# Altium PCB BUF802_Eval.PcbDoc
Units mm, origin at the board's own origin, x right, y up, seen from the top; angles counter-clockwise.
Board outline 23.25 x 13.5 mm, 4 copper layers (L1, L2, L3, L4), stack 1.641 mm thick; 41 components, 19 nets, 104 pads, 40 vias.
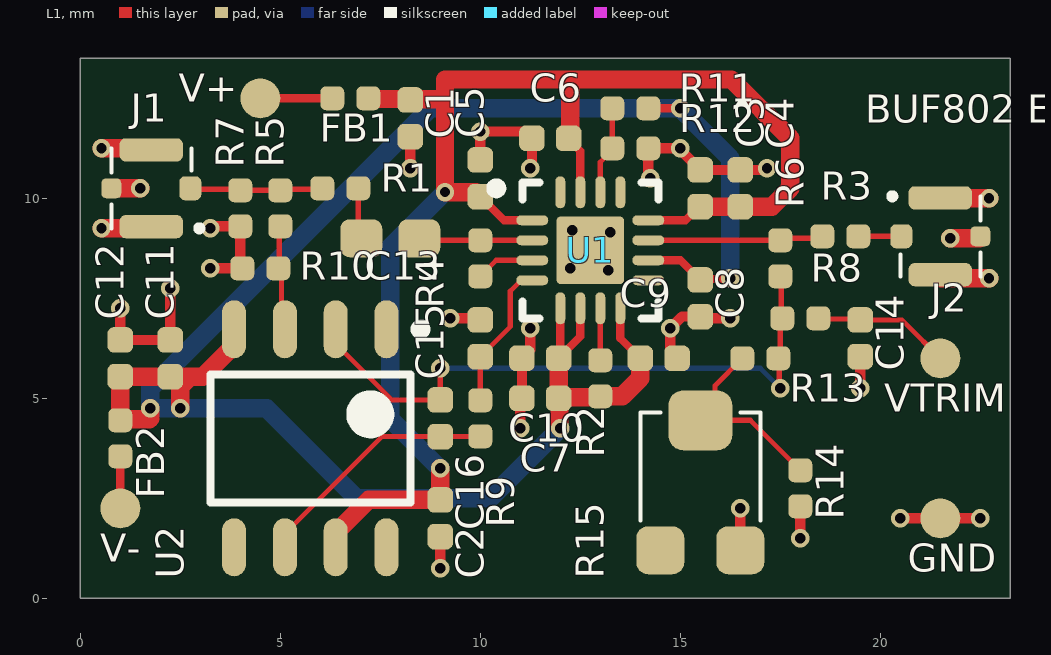
[diagram p0: L1 view]
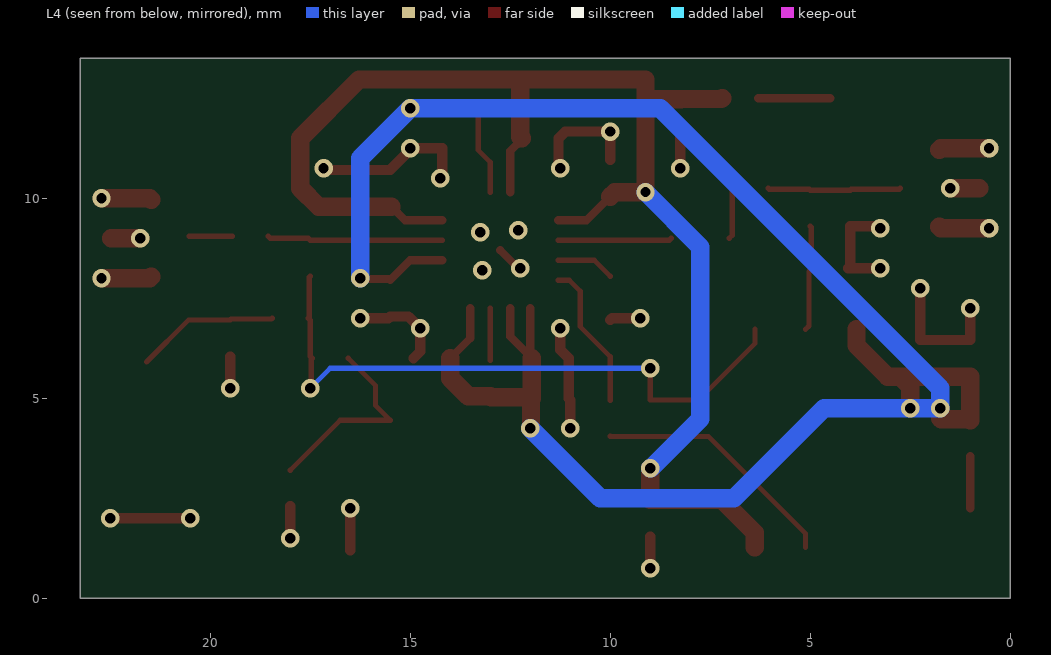
[diagram p1: L4 view, seen from below]
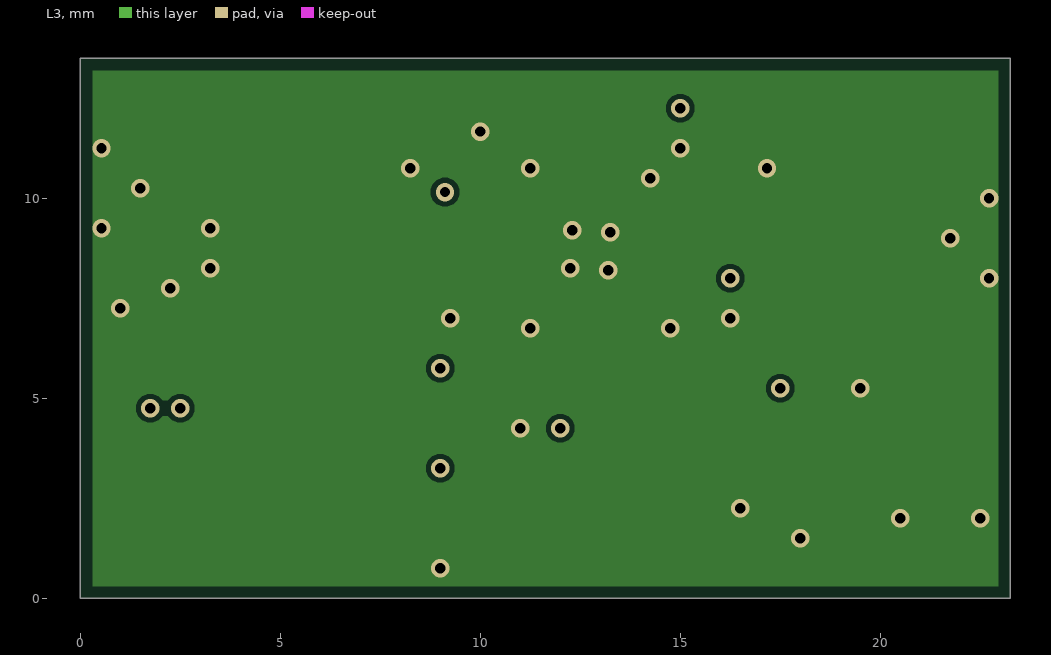
[diagram p2: L3]
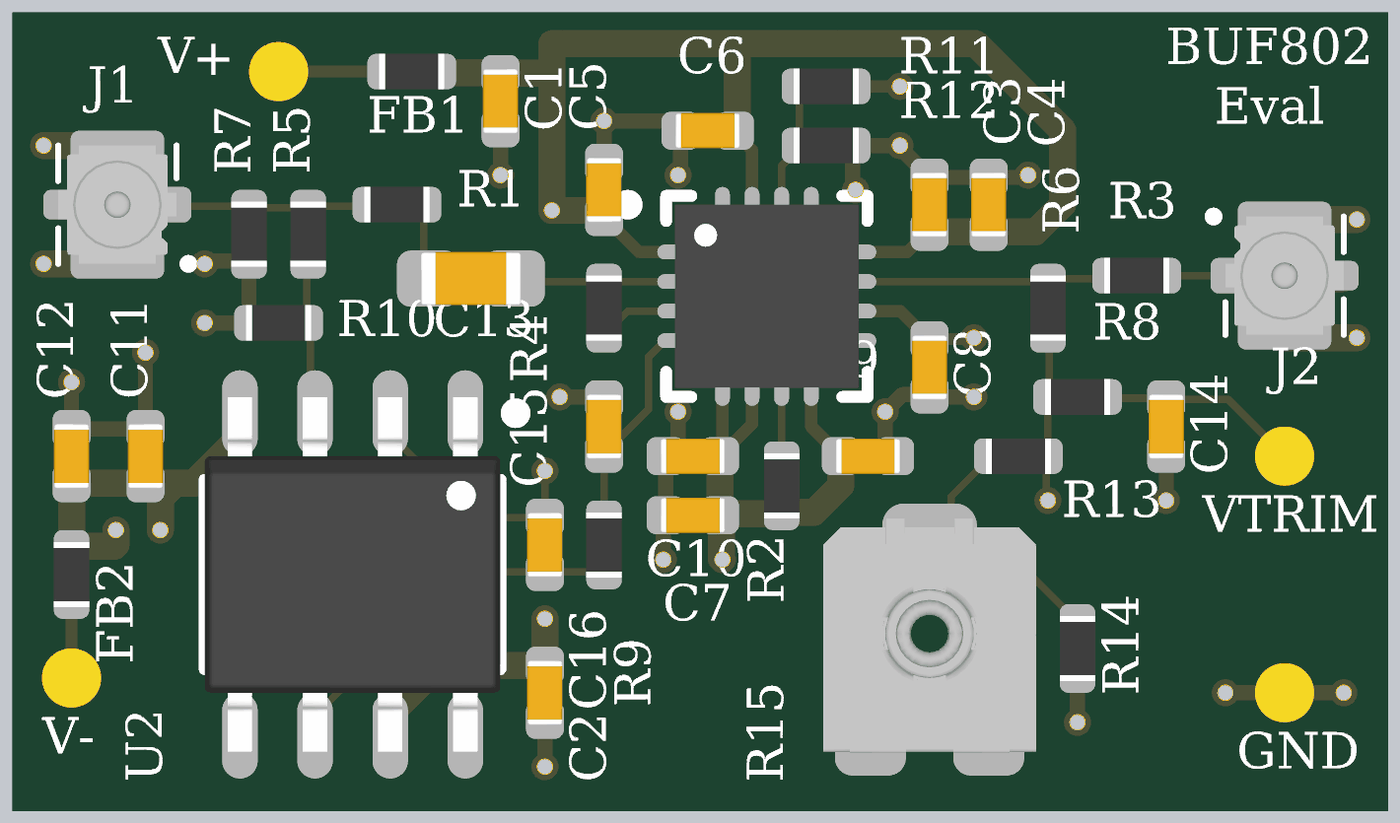
[diagram p3: 3D render of the assembled board from above, using the file's embedded part models]

## Layer stack, top to bottom
Top Solder: solder mask 0.0025, Solder Resist, Dk 1
L1: signal copper 0.0356
Prepeg1: dielectric 0.1702, FR408, Dk 3.66
L2: signal copper 0.0178
Core: dielectric 1.1938, FR-4, Dk 3.66
L3: signal copper 0.0178
Prepeg2: dielectric 0.1702, FR408, Dk 3.66
L4: signal copper 0.0356
Bottom Solder: solder mask 0.0025, Solder Resist, Dk 1

## Board outline
0,0 23.25,0 23.25,13.5 0,13.5

## Design rules (kind name [scope] priority, off if disabled: settings)
BoardOutlineClearance [All] p1: gap=0.3 ignorepadtopadclearanceinfootprint=FALSE
Clearance "Clearance Polygons" [InPolygon] p1: gap=0.127 ignorepadtopadclearanceinfootprint=FALSE
Clearance [All] p2: gap=0.127 ignorepadtopadclearanceinfootprint=FALSE except(0: Arc-Hole Track-Hole SMDPad-Hole THPad-Hole Via-Hole Fill-Hole Poly-Hole Region-Hole Text-Hole)
ComponentClearance "HM-TRP & UFL" [InComponent('X1') vs InComponent('U1')] p1: gap=0 collisioncheckmode=3 verticalgap=0 showdistances=FALSE
ComponentClearance [All] p2: gap=0.025 collisioncheckmode=3 verticalgap=0.025 showdistances=FALSE
DiffPairsRouting [All] p1: maxlimit=10 minlimit=0.127 mostfreqgap=0.203 toplayer_minwidth=0.127 toplayer_maxwidth=0.381 toplayer_prefwidth=0.203 midlayer1_minwidth=0.127 midlayer1_maxwidth=0.381 midlayer1_prefwidth=0.203 midlayer2_minwidth=0.127 midlayer2_maxwidth=0.381 midlayer2_prefwidth=0.203 bottomlayer_minwidth=0.127 bottomlayer_maxwidth=0.381 bottomlayer_prefwidth=0.203 substack1={B7EAD043-F373-4906-B1FF-5FCB2E832E9A} toplayer_{b7ead043-f373-4906-b1ff-5fcb2e832e9a}_minwidth=0.381 toplayer_{b7ead043-f373-4906-b1ff-5fcb2e832e9a}_maxwidth=0.381 toplayer_{b7ead043-f373-4906-b1ff-5fcb2e832e9a}_prefwidth=0.381 midlayer1_{b7ead043-f373-4906-b1ff-5fcb2e832e9a}_minwidth=0.381 midlayer1_{b7ead043-f373-4906-b1ff-5fcb2e832e9a}_maxwidth=0.381 midlayer1_{b7ead043-f373-4906-b1ff-5fcb2e832e9a}_prefwidth=0.381 midlayer2_{b7ead043-f373-4906-b1ff-5fcb2e832e9a}_minwidth=0.381 midlayer2_{b7ead043-f373-4906-b1ff-5fcb2e832e9a}_maxwidth=0.381 midlayer2_{b7ead043-f373-4906-b1ff-5fcb2e832e9a}_prefwidth=0.381 bottomlayer_{b7ead043-f373-4906-b1ff-5fcb2e832e9a}_minwidth=0.381 bottomlayer_{b7ead043-f373-4906-b1ff-5fcb2e832e9a}_maxwidth=0.381 bottomlayer_{b7ead043-f373-4906-b1ff-5fcb2e832e9a}_prefwidth=0.381 maxuncoupledlength=12.7
HoleSize [All] p1: absolutevalues=TRUE maxlimit=6.731 minlimit=0.254 maxpercent=80.000 minpercent=20.000
HoleToHoleClearance [All] p1: gap=0.254 allowstackedmicrovias=FALSE
MinimumAnnularRing [All] p1: minimumring=0.102
MinimumSolderMaskSliver [All] p1: minsoldermaskwidth=0
PlaneClearance [All] p1: clearance=0.254
PlaneConnect [All] p1: planeconnectstyle=Direct reliefexpansion=0.102 reliefentries=4 reliefconductorwidth=0.152 reliefairgap=0.152
PolygonConnect "Via connect style" [isVia] p1: connectstyle=Direct reliefconductorwidth=0.254 reliefentries=4 polygonreliefangle="90 Angle" airgapwidth=0.254
PolygonConnect [All] p2: connectstyle=Direct reliefconductorwidth=0.254 reliefentries=4 polygonreliefangle="90 Angle" airgapwidth=0.152
RoutingCorners [All] p1: cornerstyle=45-Degree minsetback=1.25 maxsetback=1.25
RoutingVias [All] p1: holewidth=0.254 width=0.457 viastyle="Through Hole" minholewidth=0.254 minwidth=0.457 maxholewidth=0.254 maxwidth=0.457
SilkToSilkClearance [All] p1: silktosilkclearance=0
SilkToSolderMaskClearance [IsPad] p1: minsilkscreentomaskgap=0.127 clearancetoexposedcopper=TRUE
SolderMaskExpansion [All] p1: expansion=0 istentingtop=FALSE
Width [All] p1: maxlimit=10.16 minlimit=0.127 preferedwidth=0.203 substack1={B7EAD043-F373-4906-B1FF-5FCB2E832E9A}
20 further rules are at their usual default settings.

## Components (designator, comment, footprint, x,y, rotation, side; value= is the part's Value field where it differs from the comment)
C1 "2.2uF" GEN_C_0402 8.25,12 r90 top
C2 "100nF" GEN_C_0402 9,2 r270 top
C3 "100nF" GEN_C_0402 15.5,10.25 r90 top
C4 "100nF" GEN_C_0402 16.5,10.25 r90 top
C5 "100nF" GEN_C_0402 10,10.5 r270 top
C6 "100nF" GEN_C_0402 11.75,11.5 r0 top
C7 "100nF" GEN_C_0402 11.5,5 r0 top
C8 "100nF" GEN_C_0402 15.5,7.5 r90 top
C9 "100nF" GEN_C_0402 14.46,6 r0 top
C10 "100nF" GEN_C_0402 11.5,6 r180 top
C11 "100nF" GEN_C_0402 2.25,6 r90 top
C12 "2.2uF" GEN_C_0402 1,6 r270 top
C13 "22nF" GEN_C_0603 7.75,9 r180 top
C14 "100nF" GEN_C_0402 19.5,6.5 r270 top
C15 "TBD" GEN_C_0402 10,6.5 r270 top
C16 "TBD" GEN_C_0402 9,4.5 r90 top
FB1 "120@100MHZ" GEN_R_0402 6.75,12.5 r0 top
FB2 "120@100MHZ" GEN_R_0402 1,4 r270 top
GND "PCB" GEN_TP_PCB 21.5,2 r90 top (schematic designator TP3)
J1 "UFL" TE_2334884-1 1.775,10.25 r90 top
J2 "UFL" TE_2334884-1 21.5,9.05 r270 top
R1 "49.9" GEN_R_0402 6.5,10.25 r0 top
R2 "100k" GEN_R_0402 13,5.5 r270 top
R3 "49.9" GEN_R_0402 19,9.05 r0 top
R4 "909k" GEN_R_0402 10,8.5 r90 top
R5 "909k" GEN_R_0402 5,9.75 r90 top
R6 "90.9k" GEN_R_0402 17.5,8.5 r90 top
R7 "49.9" GEN_R_0402 4,9.75 r90 top
R8 "90.9k" GEN_R_0402 18,7 r180 top
R9 "2K" GEN_R_0402 10,4.5 r270 top
R10 "90.9k" GEN_R_0402 4.5,8.25 r0 top
R11 "0" GEN_R_0402 13.75,12.25 r180 top
R12 "0" GEN_R_0402 13.75,11.25 r180 top
R13 "10K" GEN_R_0402 17,6 r0 top
R14 "DNP" GEN_R_0402 18,2.75 r90 top
R15 "5K TRIMPOT" BOU_3mm_POT 15.5,2.75 r0 top value=5K
U1 "BUF802" TI_VQFN_RGT0016C 12.75,8.7 r0 top
U2 "OP07CDR" TI_SOIC8_D0008A 5.75,4 r270 top
V+ "PCB" GEN_TP_PCB 4.5,12.5 r270 top (schematic designator TP1)
V- "PCB" GEN_TP_PCB 1,2.25 r0 top (schematic designator TP2)
VTRIM "PCB" GEN_TP_PCB 21.5,6 r90 top (schematic designator TP4)

## Footprints (in the part's own frame and the unit in brackets; to place one, negate y for a bottom-side part, rotate by r counter-clockwise, add the part's x,y. Pads: shape width x height; smd on the part's side, far side on the other; paste and mask are expansions set on the pad)
BOU_3mm_POT [mm]
  rrect50% 1.2x1.2 smd: 1(-1,-1.55) 3(1,-1.55)
  rrect50% 1.6x1.5 smd: 2(0,1.7)
  silkscreen extent -1.5,-0.8 1.5,1.9, body extent -1.8,-1.76 1.8,2.2, height 1.13
GEN_C_0402 [mm] "Chip Capacitor, 0402, IPC Medium Density"
  rrect50% 0.64x0.64 smd: 1(-0.46,0) 2(0.46,0)
  body extent -0.55,-0.3 0.55,0.3, height 0.6
GEN_C_0603 [mm] "Chip Capacitor, 2-Leads, Body 1.60x0.80mm, IPC Medium Density"
  rrect50% 1.05x0.95 smd: 1(-0.725,0) 2(0.725,0)
  body extent -0.85,-0.45 0.85,0.45, height 0.9
GEN_R_0402 [mm] "Chip Resistor, 2-Leads, Body 1.00x0.50mm, IPC Medium Density"
  rrect50% 0.6x0.6 smd: 1(-0.45,0) 2(0.45,0)
  body extent -0.55,-0.3 0.55,0.3, height 0.4
GEN_TP_PCB [mm]
  round 1 smd paste-1: 1(0,0)
TE_2334884-1 [mm]
  rrect50% 0.6x0.55 smd: 1(0,-0.975)
  rrect50% 0.58x1.58 smd: 2(-0.96,0) 2(0.96,0)
  rrect50% 0.5x0.5 smd: 2(0,1)
  silkscreen extent -1.05,-1.25 1,1, body extent -1,-1 1,1, height 0.6
TI_SOIC8_D0008A [mm] "SOIC, 8-Leads, Body 4.91x3.90mm, Pitch 1.27mm, Height 1.75mm, IPC Medium Density"
  oval 1.45x0.6 smd: 1(-2.725,1.905) 2(-2.725,0.635) 3(-2.725,-0.635) 4(-2.725,-1.905) 5(2.725,-1.905) 6(2.725,-0.635) 7(2.725,0.635) 8(2.725,1.905)
  silkscreen extent -2.85,-2.5 1.6,2.88, body extent -3,-2.5 3,2.5, height 1.75
TI_VQFN_RGT0016C [mm] "QFN, 16-Leads, Body 3.00x3.00mm, Pitch 0.50mm, Thermal Pad 1.68x1.68mm, IPC Medium Density"
  oval 0.8x0.25 smd: 1(-1.45,0.75) 2(-1.45,0.25) 3(-1.45,-0.25) 4(-1.45,-0.75) 9(1.45,-0.75) 10(1.45,-0.25) 11(1.45,0.25) 12(1.45,0.75)
  oval 0.25x0.8 smd: 5(-0.75,-1.45) 6(-0.25,-1.45) 7(0.25,-1.45) 8(0.75,-1.45) 13(0.75,1.45) 14(0.25,1.45) 15(-0.25,1.45) 16(-0.75,1.45)
  rrect10% 1.68x1.68 smd paste-0.1: 17(0,0)
  silkscreen extent -2.47,-1.7 1.7,1.7, body extent -1.55,-1.55 1.55,1.55, height 1

## Part data
C1 C12: library part "CAP 2.2uF 10V X5R 0402", Package=0402, Supplier Part Number 1=587-3153-1-ND, Voltage Rating=10V, Supplier 1=Digi-Key
C2 C3 C4 C5 C6 C7 C8 C9 C10 C11 C14: library part "CAP 100nF 16V X7R 0402", Package=0402, Supplier Part Number 1=490-4759-1-ND, Voltage Rating=16V, Supplier 1=Digi-Key
C13: library part "CAP 22nF 100V X7R 0603", Package=0603, Supplier Part Number 1=490-4782-1-ND, Voltage Rating=100V, Supplier 1=Digi-Key
C15 C16: library part "CAP TBD 0402", Package=0402
FB1 FB2: library part "FERRITE BEAD 120 OHM 0402", Supplier Part Number 1=490-9656-1-ND, Supplier 1=Digi-Key
GND V+ V- VTRIM: library part "TP PCB 1mm"
J1 J2: library part "UFL Jack SMD", Supplier Part Number 1=A145155CT-ND, Supplier 1=Digi-Key
R1 R3 R7: library part "RES 49.9 OHM 1% 1/10W 0402", Package=0402, Power Rating=0.1W, Supplier Part Number 1=311-49.9LRCT-ND, Tolerance=1%, Supplier 1=Digi-Key
R2: library part "RES 100K OHM 1% 1/10W 0402", Package=0402, Power Rating=0.1W, Supplier Part Number 1=311-100KLRCT-ND, Tolerance=1%, Supplier 1=Digi-Key
R4 R5: library part "RES 909K OHM 1% 1/16W 0402", Package=0402, Power Rating=0.0625W, Supplier Part Number 1=YAG2377CT-ND, Tolerance=1%, Supplier 1=Digi-Key
R6 R8 R10: library part "RES 90.9K OHM 1% 1/16W 0402", Package=0402, Power Rating=0.0625W, Supplier Part Number 1=311-90.9KLRCT-ND, Tolerance=1%, Supplier 1=Digi-Key
R9: library part "RES 2K OHM 1% 1/16W 0402", Package=0402, Power Rating=0.0625W, Supplier Part Number 1=311-2KLRCT-ND, Tolerance=1%, Supplier 1=Digi-Key
R11 R12: library part "RES 0 OHM 1/16W 0402", Package=0402, Power Rating=0.0625W, Supplier Part Number 1=311-0.0JRCT-ND, Supplier 1=Digi-Key
R13: library part "RES 10K OHM 1% 1/10W 0402", Package=0402, Power Rating=0.1W, Supplier Part Number 1=P10.0KLCT-ND, Tolerance=1%, Supplier 1=Digi-Key
R14: library part "RES DNP 0402", Package=0402, Power Rating=0.0625W, Tolerance=1%
R15: library part "TRIMMER 5K OHM 0.1W J LEAD TOP", Power Rating=0.1W, Supplier Part Number 1=TC33X-502ECT-ND, Tolerance=1%, Supplier 1=Digi-Key
U1: library part "IC BUFFER AMP BUF802"
U2: library part "IC OPAMP OP07CDR", Supplier Part Number 1=296-14626-1-ND, Supplier 1=Digi-Key

## Via types
v1: diameter 0.457, hole 0.254, L1 to L4, tented both sides, 40 vias

## Nets (pads, with @x,y where several pads share a name; then routed paths per layer and width w, separated by ;. In a path a pad name is that pad's centre, name@x,y a point inside that pad or via, vN(x,y) a via of type N, cw(c..) or ccw(c..) an arc to the next point about the centre after c; other vN are vias at no path point)
+4V8: C1.2 C2.1 C3.1 C4.1 C5.2 C6.2 FB1.2 U1.1 U1.12 U1.15 U2.7 | length 36.7
  L1 w0.203: C5.2 10.59,9.45 U1.1 ; C6.2 12.21,11.468 12.5,11.178 U1.15 ; U1.12 15.128,9.45 C3.1@15.468,9.79
  L1 w0.457: U2.7 6.385,1.635 7.21,2.46 C2.1 v1(9,3.25) ; FB1.2 7.22,12.48 8.23,12.48 8.237,12.473 9.119,12.473 ; C5.2 9.887,10.153 v1(9.119,10.153) 9.119,12.473 ; C6.2 12.25,11.54 12.25,12.971 ; C3.1@15.468,9.79 C3.1 C4.1 17.29,9.79 17.75,10.25 17.75,11.5 16.279,12.971 12.25,12.971 ; 9.119,12.473 9.119,12.971 12.25,12.971
  L4 w0.457: v1(9,3.25) 8.984,3.25 7.75,4.484 7.75,8.784 v1(9.119,10.153)
-4V8: C7.2 C8.2 C9.1 C10.1 C11.1 C12.2 FB2.1 R2.2 R11.1 U1.5 U1.6 U1.8 U1.10 U2.4 | length 51.6
  L1 w0.203: C10.1 12.5,6.54 U1.6 ; v1@11.98,4.27 v1(12,4.25) ; C7.2@11.98,4.98 C7.2 C7.2@11.985,5.025 ; C10.1@12,6.04 U1.5 ; R2.2@12.975,5.025 R2.2 ; U1.8 13.5,6.5 C9.1 ; U1.10 15.01,8.45 C8.2 15.52,7.98 16.23,7.98 v1(16.25,8) ; R11.1 v1(15,12.25)
  L1 w0.457: v1(1.75,4.75) 1.75,4.5 1.725,4.475 1.025,4.475 FB2.1 C12.2 C11.1 2.75,5.54 ; v1(2.5,4.75) 2.5,5.29 2.75,5.54 ; U2.4 3.845,6.317 3.068,5.54 2.75,5.54 ; C7.2 C10.1 ; v1@11.98,4.27 C7.2@11.98,4.98 ; C7.2@11.985,5.025 R2.2@12.975,5.025 ; R2.2 13.55,5.05 14,5.5 C9.1
  L4 w0.457: v1(12,4.25) 10.25,2.5 6.909,2.5 4.659,4.75 v1(2.5,4.75) v1(1.75,4.75) 1.75,5.25 8.75,12.25 v1(15,12.25) 16.25,11 v1(16.25,8)
GND: C1.1 C2.2 C3.2 C4.2 C5.1 C6.1 C7.1 C8.1 C9.2 C10.2 C11.2 C12.1 C14.2 C15.1 GND.1 J1.2 J2.2 R7.1 R10.1 R12.1 R14.1 R15.3 U1.17 | length 32.2
  L1 w0.203: v1(12.25,8.25) 12.3,8.25 U1.17
  L1 w0.254: v1(1,7.25) C12.1 C11.2 v1(2.25,7.75) ; v1(3.25,8.25) R10.1 4,8.3 R7.1 3.3,9.3 v1(3.25,9.25) ; v1(8.25,10.75) C1.1 ; v1(9,0.75) C2.2 ; v1(9.25,7) 9.96,7 C15.1 ; C5.1 v1(10,11.666) 11.124,11.666 C6.1 11.29,10.79 v1(11.25,10.75) ; v1(11,4.25) 11,4.96 C7.1 C10.2 11.25,6.21 v1(11.25,6.75) ; v1(14.25,10.5) 14.2,10.55 R12.1 v1(15,11.25) 15,11.21 C3.2 C4.2 17.21,10.71 17.25,10.75 v1(17.166,10.75) ; C9.2 14.75,6.17 v1(14.75,6.75) 15.04,7.04 C8.1 15.54,7 v1(16.25,7) ; R15.3 v1(16.5,2.25) ; v1(18,1.5) R14.1 ; v1(19.5,5.25) C14.2 ; v1(20.5,2) GND.1 v1(22.5,2)
  L1 w0.457: v1(0.529,9.25) 1.735,9.25 J1.2@1.775,9.29 ; v1(0.529,11.25) 1.735,11.25 J1.2@1.775,11.21 ; J1.2@0.775,10.25 v1(1.5,10.25) ; J2.2@21.475,8.04 21.515,8 v1(22.721,8) ; J2.2@21.475,9.96 21.515,10 v1(22.721,10) ; v1(21.75,9) J2.2@22.475,9
  other v1: 13.2,8.2 13.25,9.15 12.3,9.2
NetC13_1: C13.1 R4.2 U1.2 | length 2.8
  L1 w0.127: C13.1 8.525,8.95 R4.2 U1.2
NetC13_2: C13.2 R1.2 | length 1.3
  L1 w0.127: R1.2 6.95,9.075 C13.2
NetC14_1: C14.1 R8.1 VTRIM.1 | length 3.6
  L1 w0.127: R8.1 18.47,6.98 19.48,6.98 C14.1 20.54,6.96 VTRIM.1@21.593,5.907
NetC15_2: C15.2 R9.1 U1.4 | length 3.7
  L1 w0.127: R9.1 C15.2 10.75,6.79 10.75,7.675 11.025,7.95 U1.4
NetC16_1: C16.1 R9.2 U2.6 | length 6.2
  L1 w0.127: U2.6 5.115,1.615 7.54,4.04 C16.1 9.005,4.045 9.995,4.045 R9.2
NetC16_2: C16.2 R6.1 R8.2 R13.2 U2.2 | length 16
  L1 w0.127: U2.2 6.385,6.365 7.79,4.96 C16.2 v1(9,5.75) ; R13.2 R13.2@17.475,6.025 ; v1(17.5,5.25) 17.475,5.275 R13.2@17.475,6.025 ; R6.1 17.525,8.025 17.525,7.025 R8.2 17.5,6.95 17.5,6.05 R13.2@17.475,6.025
  L4 w0.127: v1(9,5.75) 17,5.75 v1(17.5,5.25)
NetFB1_1: FB1.1 V+.1 | length 1.8
  L1 w0.203: V+.1 FB1.1
NetFB2_2: FB2.2 V-.1 | length 1.3
  L1 w0.203: V-.1 FB2.2
NetJ1_1: J1.1 R1.1 R5.2 R7.2 | length 3.3
  L1 w0.127: J1.1 2.775,10.225 3.975,10.225 R7.2 R5.2 5.025,10.225 6.025,10.225 R1.1
NetJ2_1: J2.1 R3.2 | length 1.1
  L1 w0.127: R3.2 J2.1
NetR2_1: R2.1 U1.7 | length 1.3
  L1 w0.127: R2.1 U1.7
NetR3_1: R3.1 R6.2 U1.11 | length 4.4
  L1 w0.127: U1.11 R6.2 17.55,9 18.5,9 R3.1
NetR4_1: R4.1 U1.3 | length 1.5
  L1 w0.127: R4.1 10.4,8.45 U1.3
NetR5_1: R5.1 R10.2 U2.3 | length 2.7
  L1 w0.127: R5.1 4.975,9.275 4.975,8.275 R10.2 5.033,8.168 5.033,6.807 U2.3
NetR11_2: R11.2 R12.2 U1.14 | length 2.2
  L1 w0.127: U1.14 13,10.903 13.3,11.203 R12.2 R11.2
NetR13_1: R13.1 R14.2 R15.2 | length 5
  L1 w0.127: R13.1 15.866,5.316 15.866,4.816 R15.2 16.75,4.45 R14.2
pads on no net: R15.1 U1.9 U1.13 U1.16 U2.1 U2.5 U2.8

## Polygon pours and split planes (outlines as drawn)
GND on L3 "GND_L01" (solid, remove dead copper, pour order 0): 0,13.5 23.25,13.5 23.25,0 0,0

## Silkscreen, mask and mechanical layers (free items; w line width, h text height)
Top Overlay:
  text "BUF802 Eval" at 19.624,11.654 h1.2
Mechanical 1:
  the board outline again, w0.05